# Altium PCB 18f4550.PcbDoc
Units mm, origin at the board's own origin, x right, y up, seen from the top; angles counter-clockwise.
Board outline 127 x 101.6 mm, 2 copper layers (Top Layer, Bottom Layer); 13 components, 39 nets, 96 pads, 0 vias.
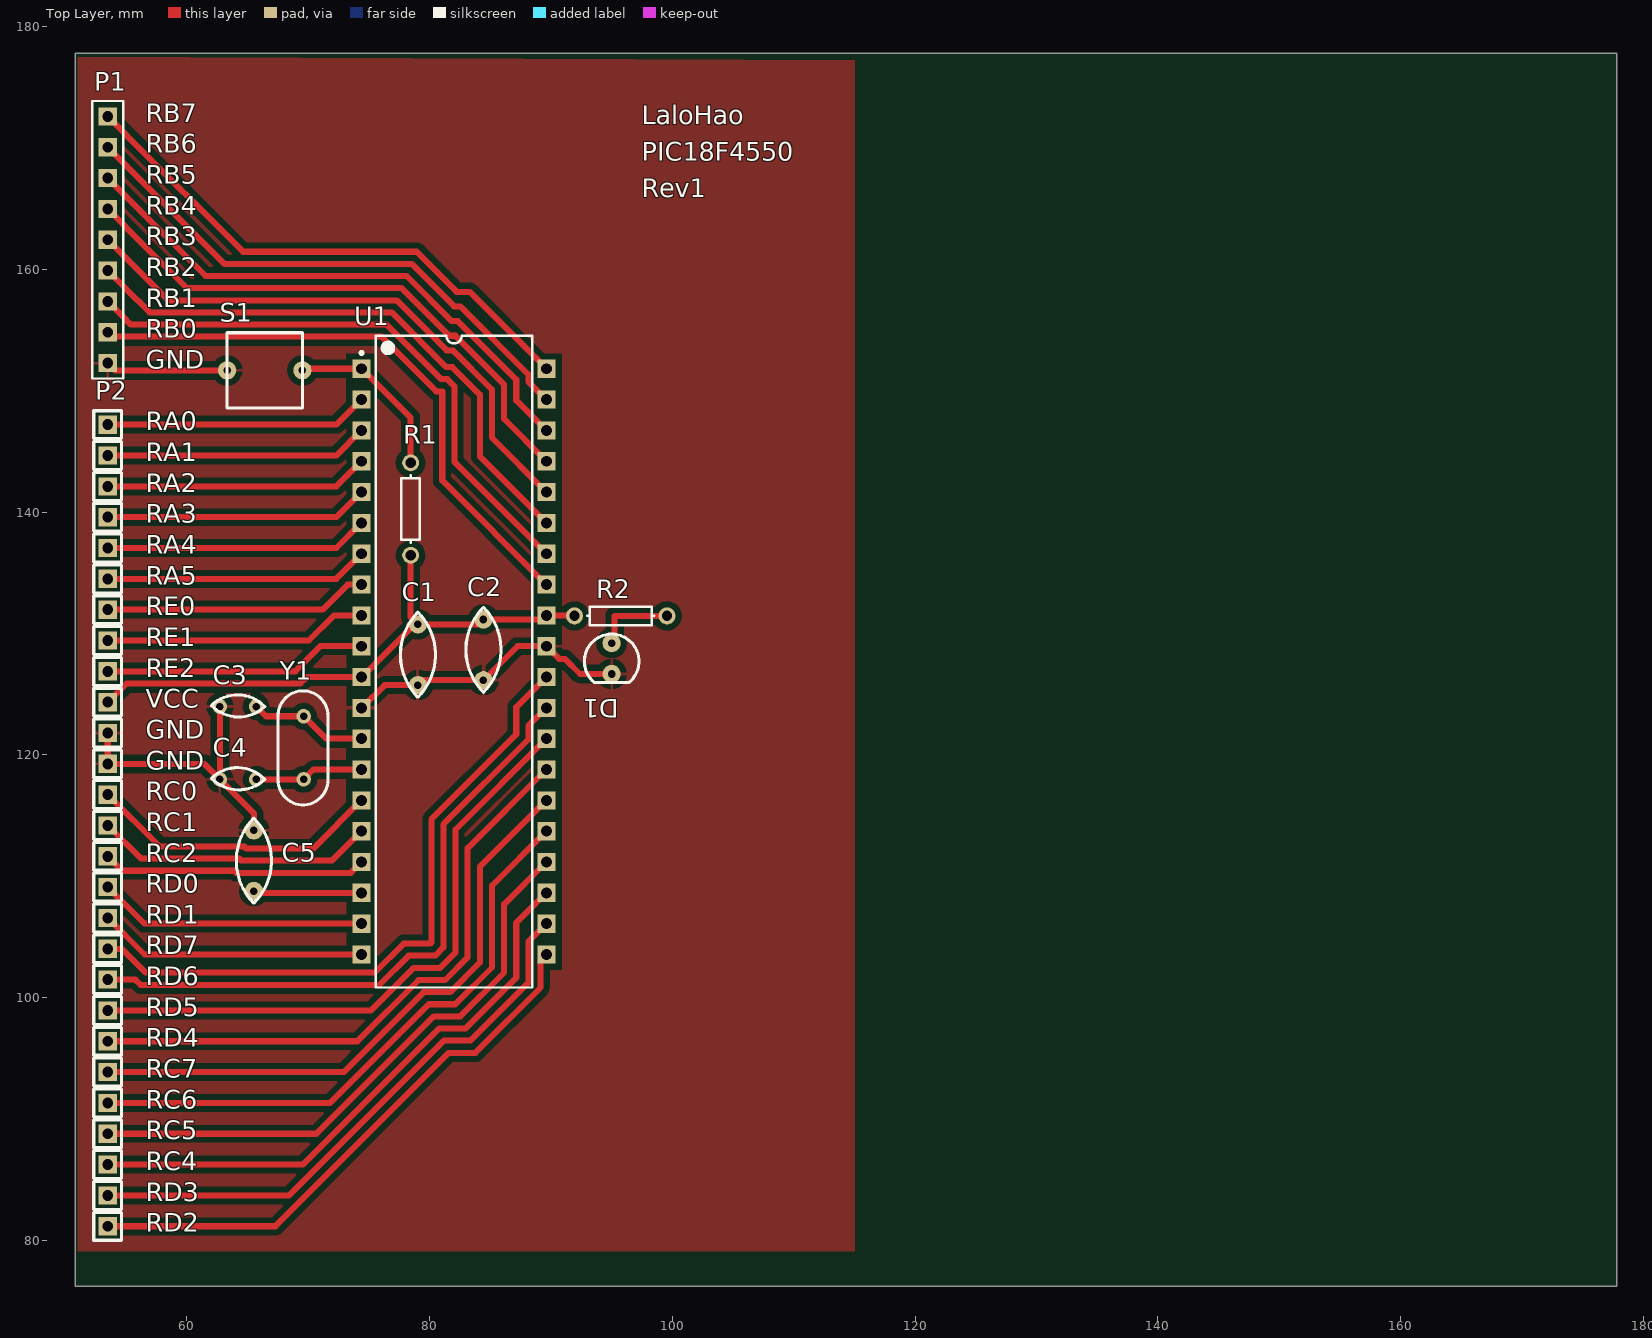
[diagram p0: Top Layer view]
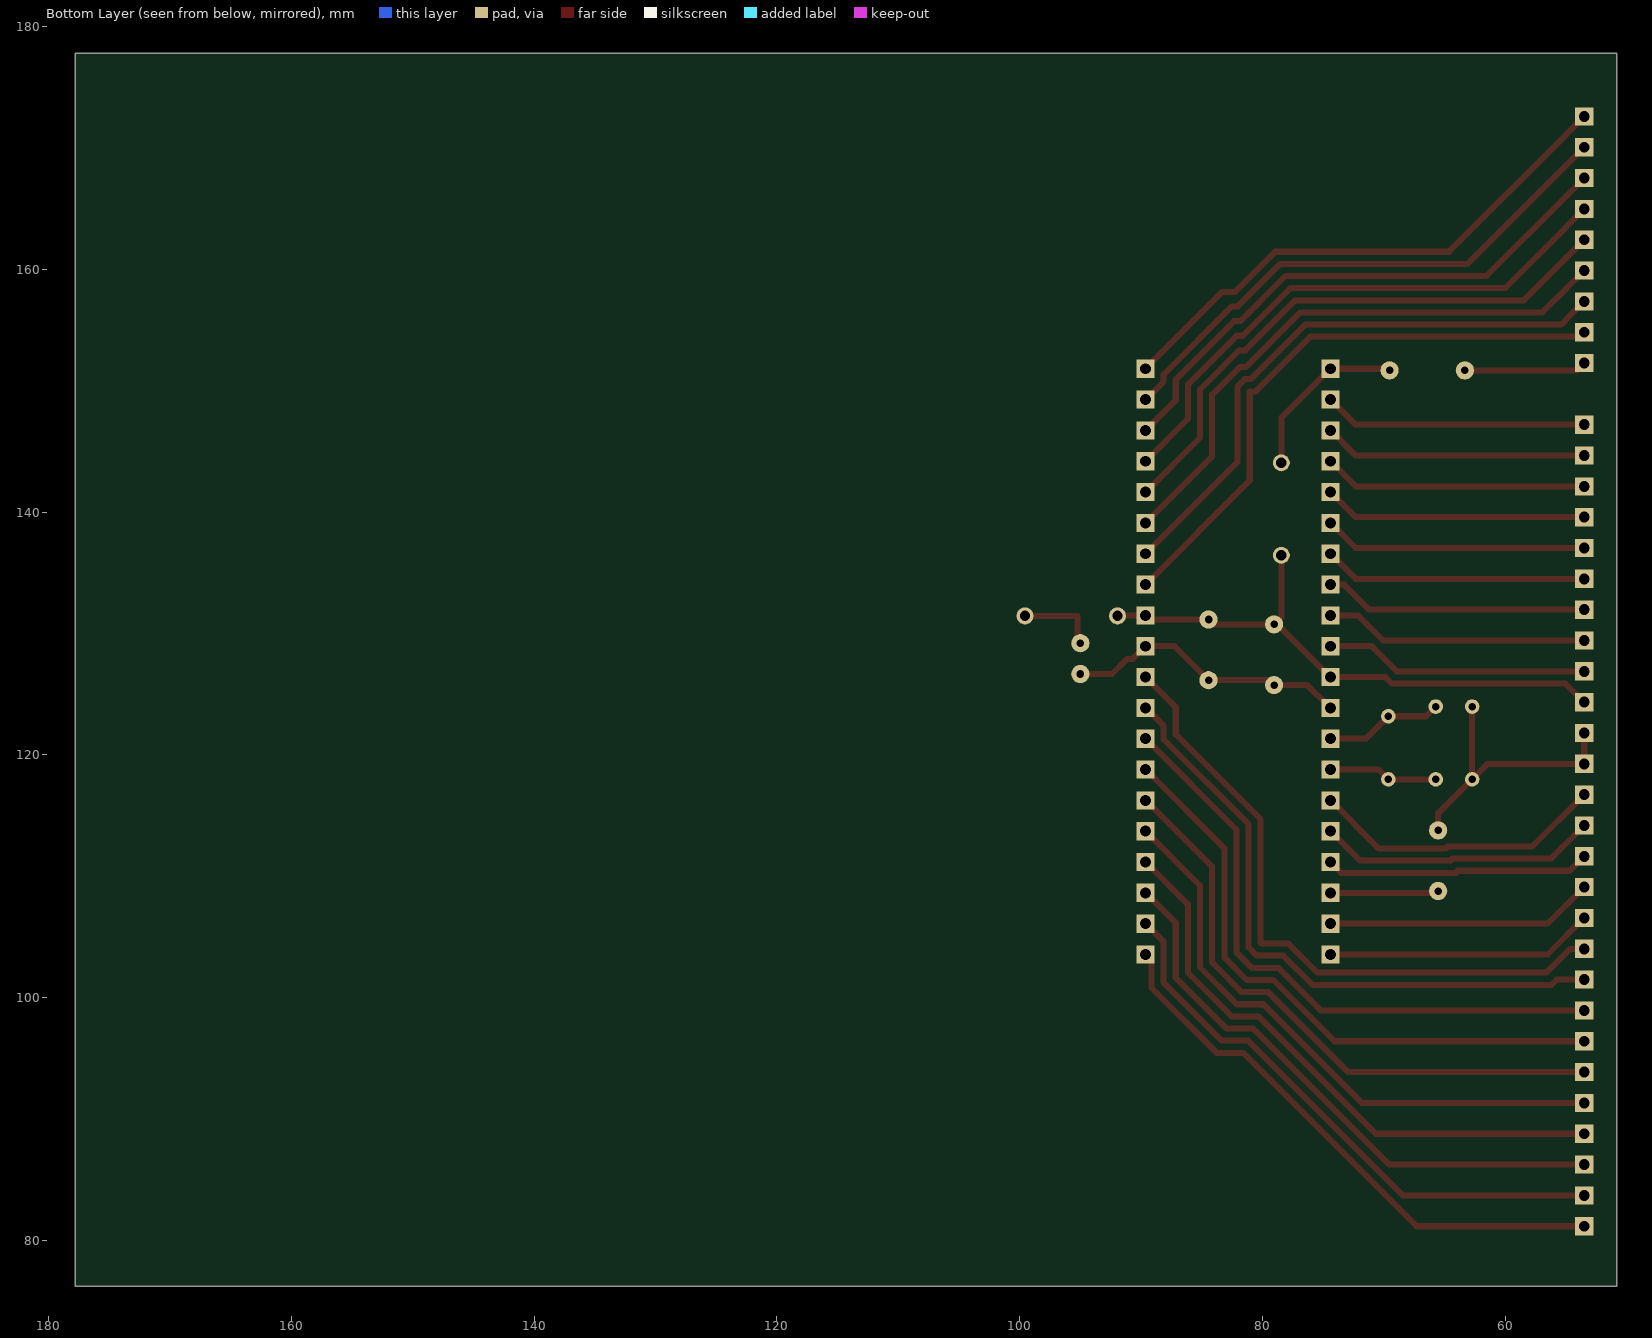
[diagram p1: Bottom Layer view, seen from below]

## Layer stack, top to bottom
Top Layer: signal copper 0.0356
Dielectric: dielectric 0.32, FR-4, Dk 4.8
Bottom Layer: signal copper 0.0356

## Board outline
50.8,76.2 177.8,76.2 177.8,177.8 50.8,177.8

## Design rules (kind name [scope] priority, off if disabled: settings)
Clearance [All] p1: gap=0.5
PolygonConnect [All] p1: connectstyle=Relief reliefconductorwidth=0.254 reliefentries=4 polygonreliefangle="90 Angle"
RoomDefinition 18f4550 [InComponentClass('18f4550')] p1: confinementstyle=ConfineIn formatcopy=TRUE lockcomponents=FALSE outline 51.03,79.093 115.032,79.093 115.032,177.208 51.03,177.208
RoutingVias [All] p1: holewidth=0.6 width=1.2 viastyle="Through Hole" minholewidth=0.711 minwidth=1.27 maxholewidth=0.711 maxwidth=1.27
SilkscreenOverComponentPads [All] p1: minsilkscreentomaskgap=0.254
SolderMaskExpansion [All] p1: expansion=0.102
Width [All] p1: maxlimit=0.5 minlimit=0.5 preferedwidth=0.5
27 further rules are at their usual default settings.

## Components (designator, comment, footprint, x,y, rotation, side; value= is the part's Value field where it differs from the comment)
C1 "Cap" CAP-CER1 79.032,125.748 r90 top
C2 "Cap" CAP-CER1 84.432,126.148 r90 top
C3 "Cap" CAP-CER2 65.712,123.978 r180 top
C4 "Cap" CAP-CER2 65.712,117.978 r180 top
C5 "Cap" CAP-CER1 65.512,113.778 r270 top
D1 "LED0" LED-3MM 94.992,129.198 r270 top
P1 "Header 9" HDR1X9 53.472,172.598 r270 top
P2 "MHDR1X27" MHDR1X27 53.472,81.158 r90 top
R1 "Res1" AXIAL-0.3 78.432,140.248 r270 top
R2 "Res1" AXIAL-0.3 95.742,131.448 r180 top
S1 "SW-SPST" SW-SPST-SIL 63.312,151.678 r0 top
U1 "PIC18F4550-I/P" 4550 82.012,127.678 r0 top
Y1 "XTAL" XTAL 69.612,123.178 r270 top

## Footprints (in the part's own frame and the unit in brackets; to place one, negate y for a bottom-side part, rotate by r counter-clockwise, add the part's x,y. Pads: shape width x height; smd on the part's side, far side on the other; paste and mask are expansions set on the pad)
4550 [mm] "DIP, 40-Leads, Row Spacing 15.24mm, Pitch 2.54mm, Body 51.8x13.5mm"
  rect 1.5x1.5 hole 0.9: 1(-7.62,24.13) 2(-7.62,21.59) 3(-7.62,19.05) 4(-7.62,16.51) 5(-7.62,13.97) 6(-7.62,11.43) 7(-7.62,8.89) 8(-7.62,6.35) 9(-7.62,3.81) 10(-7.62,1.27) 11(-7.62,-1.27) 12(-7.62,-3.81) 13(-7.62,-6.35) 14(-7.62,-8.89) 15(-7.62,-11.43) 16(-7.62,-13.97) 17(-7.62,-16.51) 18(-7.62,-19.05) 19(-7.62,-21.59) 20(-7.62,-24.13) 21(7.62,-24.13) 22(7.62,-21.59) 23(7.62,-19.05) 24(7.62,-16.51) 25(7.62,-13.97) 26(7.62,-11.43) 27(7.62,-8.89) 28(7.62,-6.35) 29(7.62,-3.81) 30(7.62,-1.27) 31(7.62,1.27) 32(7.62,3.81) 33(7.62,6.35) 34(7.62,8.89) 35(7.62,11.43) 36(7.62,13.97) 37(7.62,16.51) 38(7.62,19.05) 39(7.62,21.59) 40(7.62,24.13)
  silkscreen extent -7.74,-26.85 6.45,26.85, body extent -7.3,-26.85 7.3,26.85, height 6.35
AXIAL-0.3 [mm] "Axial Device, Thru-Hole; 2 Leads; 0.3 in Pin Spacing"
  round 1.4 hole 0.85: 1(-3.81,0) 2(3.81,0)
  silkscreen extent -2.77,-0.76 2.77,0.76
CAP-CER1 [mm]
  round 1.5 hole 0.62: 1(5,0) 2(0,0)
  silkscreen extent -1,-1.45 6,1.45
CAP-CER2 [mm]
  round 1.2 hole 0.62: 1(0,0) 2(3,0)
  silkscreen extent -0.7,-0.96 3.7,0.86
HDR1X9 [mm] "Connector; Header; 9 Position"
  rect 1.5x1.5 hole 0.9: 1(0,0) 2(2.54,0) 3(5.08,0) 4(7.62,0) 5(10.16,0) 6(12.7,0) 7(15.24,0) 8(17.78,0) 9(20.32,0)
  silkscreen extent -1.27,-1.27 21.59,1.27
LED-3MM [mm]
  round 1.5 hole 0.62: 1(0,0) 2(2.54,0)
  silkscreen extent -0.75,-2.25 3.22,2.25
MHDR1X27 [mm]
  rect 1.5x1.5 hole 0.9: 1(0,0) 2(2.54,0) 3(5.08,0) 4(7.62,0) 5(10.16,0) 6(12.7,0) 7(15.24,0) 8(17.78,0) 9(20.32,0) 10(22.86,0) 11(25.4,0) 12(27.94,0) 13(30.48,0) 14(33.02,0) 15(35.56,0) 16(38.1,0) 17(40.64,0) 18(43.18,0) 19(45.72,0) 20(48.26,0) 21(50.8,0) 22(53.34,0) 23(55.88,0) 24(58.42,0) 25(60.96,0) 26(63.5,0) 27(66.04,0)
  silkscreen extent -1.15,-1.15 67.19,1.15
SW-SPST-SIL [mm]
  round 1.5 hole 0.62: 1(6.2,0) 2(0,0)
  silkscreen extent 0,-3.1 6.2,3.1
XTAL [mm]
  round 1.2 hole 0.62: 1(0,0) 2(5.2,0)
  silkscreen extent -2.1,-2.1 7.3,2

## Part data
C1 C2 C3 C4 C5: "Capacitor"
D1: "Typical INFRARED GaAs LED"
P1: "Header, 9-Pin"
R1 R2: "Resistor"
S1: "Single-Pole, Single-Throw Switch"
U1: "High Performance, Enhanced Flash, USB Microcontroller with nanoWatt Technology, 32K Flash, 40-Pin PDIP, Industrial Temperature Range"
Y1: "Crystal Oscillator"

## Nets (pads, with @x,y where several pads share a name; then routed paths per layer and width w, separated by ;. In a path a pad name is that pad's centre, name@x,y a point inside that pad or via, vN(x,y) a via of type N, cw(c..) or ccw(c..) an arc to the next point about the centre after c; other vN are vias at no path point)
GND: C1.2 C2.2 C3.2 C4.2 C5.2 D1.2 P1.9 P2.16 P2.17 S1.2 U1.12 U1.31 | length 56.6
  Top Layer w0.5: P2.17 P2.16 61.432,119.258 C4.2 ; P1.9@54.072,151.678 S1.2 ; C3.2 C4.2 ; C5.2 65.512,115.178 C4.2 ; U1.12 74.413,123.868 76.293,125.748 C1.2 79.432,126.148 C2.2 87.232,128.948 U1.31 90.672,127.908 91.132,127.908 92.382,126.658 D1.2
NetC1_1: C1.1 C2.1 P2.18 R1.2 R2.2 U1.11 U1.32 | length 47.3
  Top Layer w0.5: P2.18 53.493,124.338 55.033,125.878 69.338,125.878 69.868,126.408 U1.11 74.413,126.408 78.753,130.748 C1.1 ; R1.2 78.432,131.348 C1.1 ; R2.2@91.892,131.488 U1.32 89.292,131.148 C2.1 84.032,130.748 C1.1
NetC3_1: C3.1 U1.13 Y1.1 | length 9.8
  Top Layer w0.5: C3.1 66.512,123.178 Y1.1 71.462,121.328 U1.13
NetC4_1: C4.1 U1.14 Y1.2 | length 9
  Top Layer w0.5: C4.1 Y1.2 70.422,118.788 U1.14
NetC5_1: C5.1 U1.18 | length 8.9
  Top Layer w0.5: C5.1 65.662,108.628 U1.18
NetD1_1: D1.1 R2.1 | length 6.3
  Top Layer w0.5: D1.1@95.242,129.448 95.242,131.448 R2.1
NetP1_1: P1.1 U1.40 | length 44.8
  Top Layer w0.5: P1.1 53.493,172.598 54.972,171.119 54.972,171.098 64.622,161.448 78.931,161.448 82.232,158.148 83.292,158.148 U1.40
NetP1_2: P1.2 U1.39 | length 45.1
  Top Layer w0.5: P1.2 53.493,170.058 54.972,168.579 54.972,168.558 63.082,160.448 78.517,160.448 82.025,156.941 82.525,156.941 88.132,151.333 88.132,150.747 89.611,149.268 U1.39
NetP1_3: P1.3 U1.38 | length 45.8
  Top Layer w0.5: P1.3 53.493,167.518 54.972,166.039 54.972,166.018 61.542,159.448 78.103,159.448 81.818,155.734 82.318,155.734 87.132,150.919 87.132,149.207 89.611,146.728 U1.38
NetP1_4: P1.4 U1.37 | length 46.4
  Top Layer w0.5: P1.4 53.493,164.978 54.972,163.499 54.972,163.478 60.002,158.448 77.689,158.448 81.61,154.526 82.11,154.526 86.132,150.505 86.132,147.667 89.611,144.188 U1.37
NetP1_5: P1.5 U1.36 | length 47.1
  Top Layer w0.5: P1.5 53.493,162.438 54.972,160.959 54.972,160.938 58.462,157.448 77.275,157.448 81.403,153.319 81.903,153.319 85.132,150.091 85.132,146.127 89.611,141.648 U1.36
NetP1_6: P1.6 U1.35 | length 47.8
  Top Layer w0.5: P1.6 53.493,159.898 54.972,158.419 54.972,158.398 56.922,156.448 76.86,156.448 81.36,151.948 81.86,151.948 84.132,149.676 84.132,144.587 89.611,139.108 U1.35
NetP1_7: P1.7 U1.34 | length 48.4
  Top Layer w0.5: P1.7 53.493,157.358 54.972,155.879 54.972,155.858 55.382,155.448 76.446,155.448 80.946,150.948 81.446,150.948 82.032,150.362 82.032,144.147 89.611,136.568 U1.34
NetP1_8: P1.8 U1.33 | length 49.1
  Top Layer w0.5: P1.8 53.842,154.448 76.032,154.448 80.532,149.948 81.032,149.948 81.032,142.607 89.611,134.028 U1.33
NetP2_1: P2.1 U1.21 | length 46.7
  Top Layer w0.5: P2.1 67.291,81.158 81.581,95.448 83.76,95.448 89.132,100.82 89.132,102.999 89.632,103.499 U1.21
NetP2_2: P2.2 U1.22 | length 47.4
  Top Layer w0.5: P2.2 68.416,83.698 81.166,96.448 83.346,96.448 88.132,101.234 88.132,104.609 89.611,106.088 U1.22
NetP2_3: P2.3 U1.23 | length 48.1
  Top Layer w0.5: P2.3 69.542,86.238 80.752,97.448 82.931,97.448 87.132,101.649 87.132,106.149 89.611,108.628 U1.23
NetP2_4: P2.4 U1.24 | length 48.7
  Top Layer w0.5: P2.4 70.668,88.778 80.338,98.448 82.517,98.448 86.132,102.063 86.132,107.689 89.611,111.168 U1.24
NetP2_5: P2.5 U1.25 | length 49.4
  Top Layer w0.5: P2.5 71.794,91.318 79.924,99.448 82.103,99.448 85.132,102.477 85.132,109.229 89.611,113.708 U1.25
NetP2_6: P2.6 U1.26 | length 50
  Top Layer w0.5: P2.6 72.919,93.858 79.51,100.448 81.689,100.448 84.132,102.891 84.132,110.769 89.611,116.248 U1.26
NetP2_7: P2.7 U1.27 | length 50.7
  Top Layer w0.5: P2.7 74.045,96.398 79.095,101.448 81.275,101.448 83.132,103.305 83.132,112.309 89.611,118.788 U1.27
NetP2_8: P2.8 U1.28 | length 51.4
  Top Layer w0.5: P2.8 75.171,98.938 78.681,102.448 80.86,102.448 82.132,103.72 82.132,113.849 89.611,121.328 U1.28
NetP2_9: P2.9 U1.29 | length 52.4
  Top Layer w0.5: P2.9 55.744,101.478 56.174,101.048 75.867,101.048 78.267,103.448 80.446,103.448 81.132,104.134 81.132,114.263 88.132,121.263 88.132,122.389 89.611,123.868 U1.29
NetP2_10: P2.10 U1.30 | length 54.3
  Top Layer w0.5: P2.10 54.618,104.018 56.588,102.048 75.453,102.048 77.853,104.448 80.032,104.448 80.132,104.548 80.132,114.677 87.132,121.677 87.132,123.929 89.611,126.408 U1.30
NetP2_11: P2.11 U1.20 | length 22.2
  Top Layer w0.5: P2.11 53.493,106.558 56.503,103.548 U1.20
NetP2_12: P2.12 U1.19 | length 22.2
  Top Layer w0.5: P2.12 53.493,109.098 56.503,106.088 U1.19
NetP2_13: P2.13 U1.17 | length 21.9
  Top Layer w0.5: P2.13 53.493,111.638 54.683,110.448 63.892,110.448 64.062,110.278 73.502,110.278 U1.17
NetP2_14: P2.14 U1.16 | length 23.1
  Top Layer w0.5: P2.14 53.493,114.178 56.223,111.448 64.306,111.448 64.476,111.278 71.941,111.278 74.371,113.708 U1.16
NetP2_15: P2.15 U1.15 | length 24.4
  Top Layer w0.5: P2.15 53.493,116.718 57.763,112.448 64.721,112.448 64.891,112.278 70.401,112.278 74.371,116.248 U1.15
NetP2_19: P2.19 U1.10 | length 21.8
  Top Layer w0.5: P2.19 68.924,126.878 70.994,128.948 U1.10
NetP2_20: P2.20 U1.9 | length 21.8
  Top Layer w0.5: P2.20 70.05,129.418 72.12,131.488 U1.9
NetP2_21: P2.21 U1.8 | length 21.8
  Top Layer w0.5: P2.21 71.176,131.958 73.246,134.028 U1.8
NetP2_22: P2.22 U1.7 | length 21.8
  Top Layer w0.5: P2.22 72.301,134.498 74.371,136.568 U1.7
NetP2_23: P2.23 U1.6 | length 21.8
  Top Layer w0.5: P2.23 72.301,137.038 74.371,139.108 U1.6
NetP2_24: P2.24 U1.5 | length 21.8
  Top Layer w0.5: P2.24 72.301,139.578 74.371,141.648 U1.5
NetP2_25: P2.25 U1.4 | length 21.8
  Top Layer w0.5: P2.25 72.301,142.118 74.371,144.188 U1.4
NetP2_26: P2.26 U1.3 | length 21.8
  Top Layer w0.5: P2.26 72.301,144.658 74.371,146.728 U1.3
NetP2_27: P2.27 U1.2 | length 21.8
  Top Layer w0.5: P2.27 72.301,147.198 74.371,149.268 U1.2
NetR1_1: R1.1 S1.1 U1.1 | length 14.2
  Top Layer w0.5: S1.1@69.642,151.808 U1.1 74.413,151.808 78.432,147.789 R1.1

## Polygon pours and split planes (outlines as drawn)
GND on Top Layer "Top Layer-No Net" (solid, pour order 14): 51,177.5 51,79.123 51.03,79.093 115.032,79.093 115.032,177.208

## Silkscreen, mask and mechanical layers (free items; w line width, h text height)
Top Overlay:
  text "RB7" at 56.612,172.128 h1.52
  text "LaloHao" at 97.492,171.948 h1.52
  text "RB6" at 56.612,169.588 h1.52
  text "PIC18F4550" at 97.492,168.948 h1.52
  text "RB5" at 56.612,167.048 h1.52
  text "Rev1" at 97.492,165.948 h1.52
  text "RB4" at 56.612,164.508 h1.52
  text "RB3" at 56.612,161.968 h1.52
  text "RB2" at 56.612,159.428 h1.52
  text "RB1" at 56.612,156.888 h1.52
  text "RB0" at 56.612,154.348 h1.52
  text "GND" at 56.612,151.808 h1.52
  text "RA0" at 56.612,146.728 h1.52
  text "RA1" at 56.612,144.188 h1.52
  text "RA2" at 56.612,141.648 h1.52
  text "RA3" at 56.612,139.108 h1.52
  text "RA4" at 56.612,136.568 h1.52
  text "RA5" at 56.612,134.028 h1.52
  text "RE0" at 56.612,131.488 h1.52
  text "RE1" at 56.612,128.948 h1.52
  text "RE2" at 56.612,126.408 h1.52
  text "VCC" at 56.612,123.868 h1.52
  text "GND" at 56.612,121.328 h1.52
  text "GND" at 56.612,118.788 h1.52
  text "RC0" at 56.612,116.248 h1.52
  text "RC1" at 56.612,113.708 h1.52
  text "RC2" at 56.612,111.168 h1.52
  text "RD0" at 56.612,108.628 h1.52
  text "RD1" at 56.612,106.088 h1.52
  text "RD7" at 56.612,103.548 h1.52
  text "RD6" at 56.612,101.008 h1.52
  text "RD5" at 56.612,98.468 h1.52
  text "RD4" at 56.612,95.928 h1.52
  text "RC7" at 56.612,93.388 h1.52
  text "RC6" at 56.612,90.848 h1.52
  text "RC5" at 56.612,88.308 h1.52
  text "RC4" at 56.612,85.768 h1.52
  text "RD3" at 56.612,83.228 h1.52
  text "RD2" at 56.612,80.688 h1.52

## Dimensions
52.1,77.5 to 176.5,77.5 on Mechanical 1
52.1,77.5 to 52.1,176.5 on Mechanical 1